# Altium PCB 05-7Segment(74HC595).PcbDoc
Units mm, origin at the board's own origin, x right, y up, seen from the top; angles counter-clockwise.
Board outline 40 x 40 mm, 4 copper layers (Top Layer, Internal Plane 1, Internal Plane 2, Bottom Layer), stack 0.462 mm thick; 21 components, 49 nets, 142 pads, 16 vias.
Unrouted connection lines stored in the file: 83.
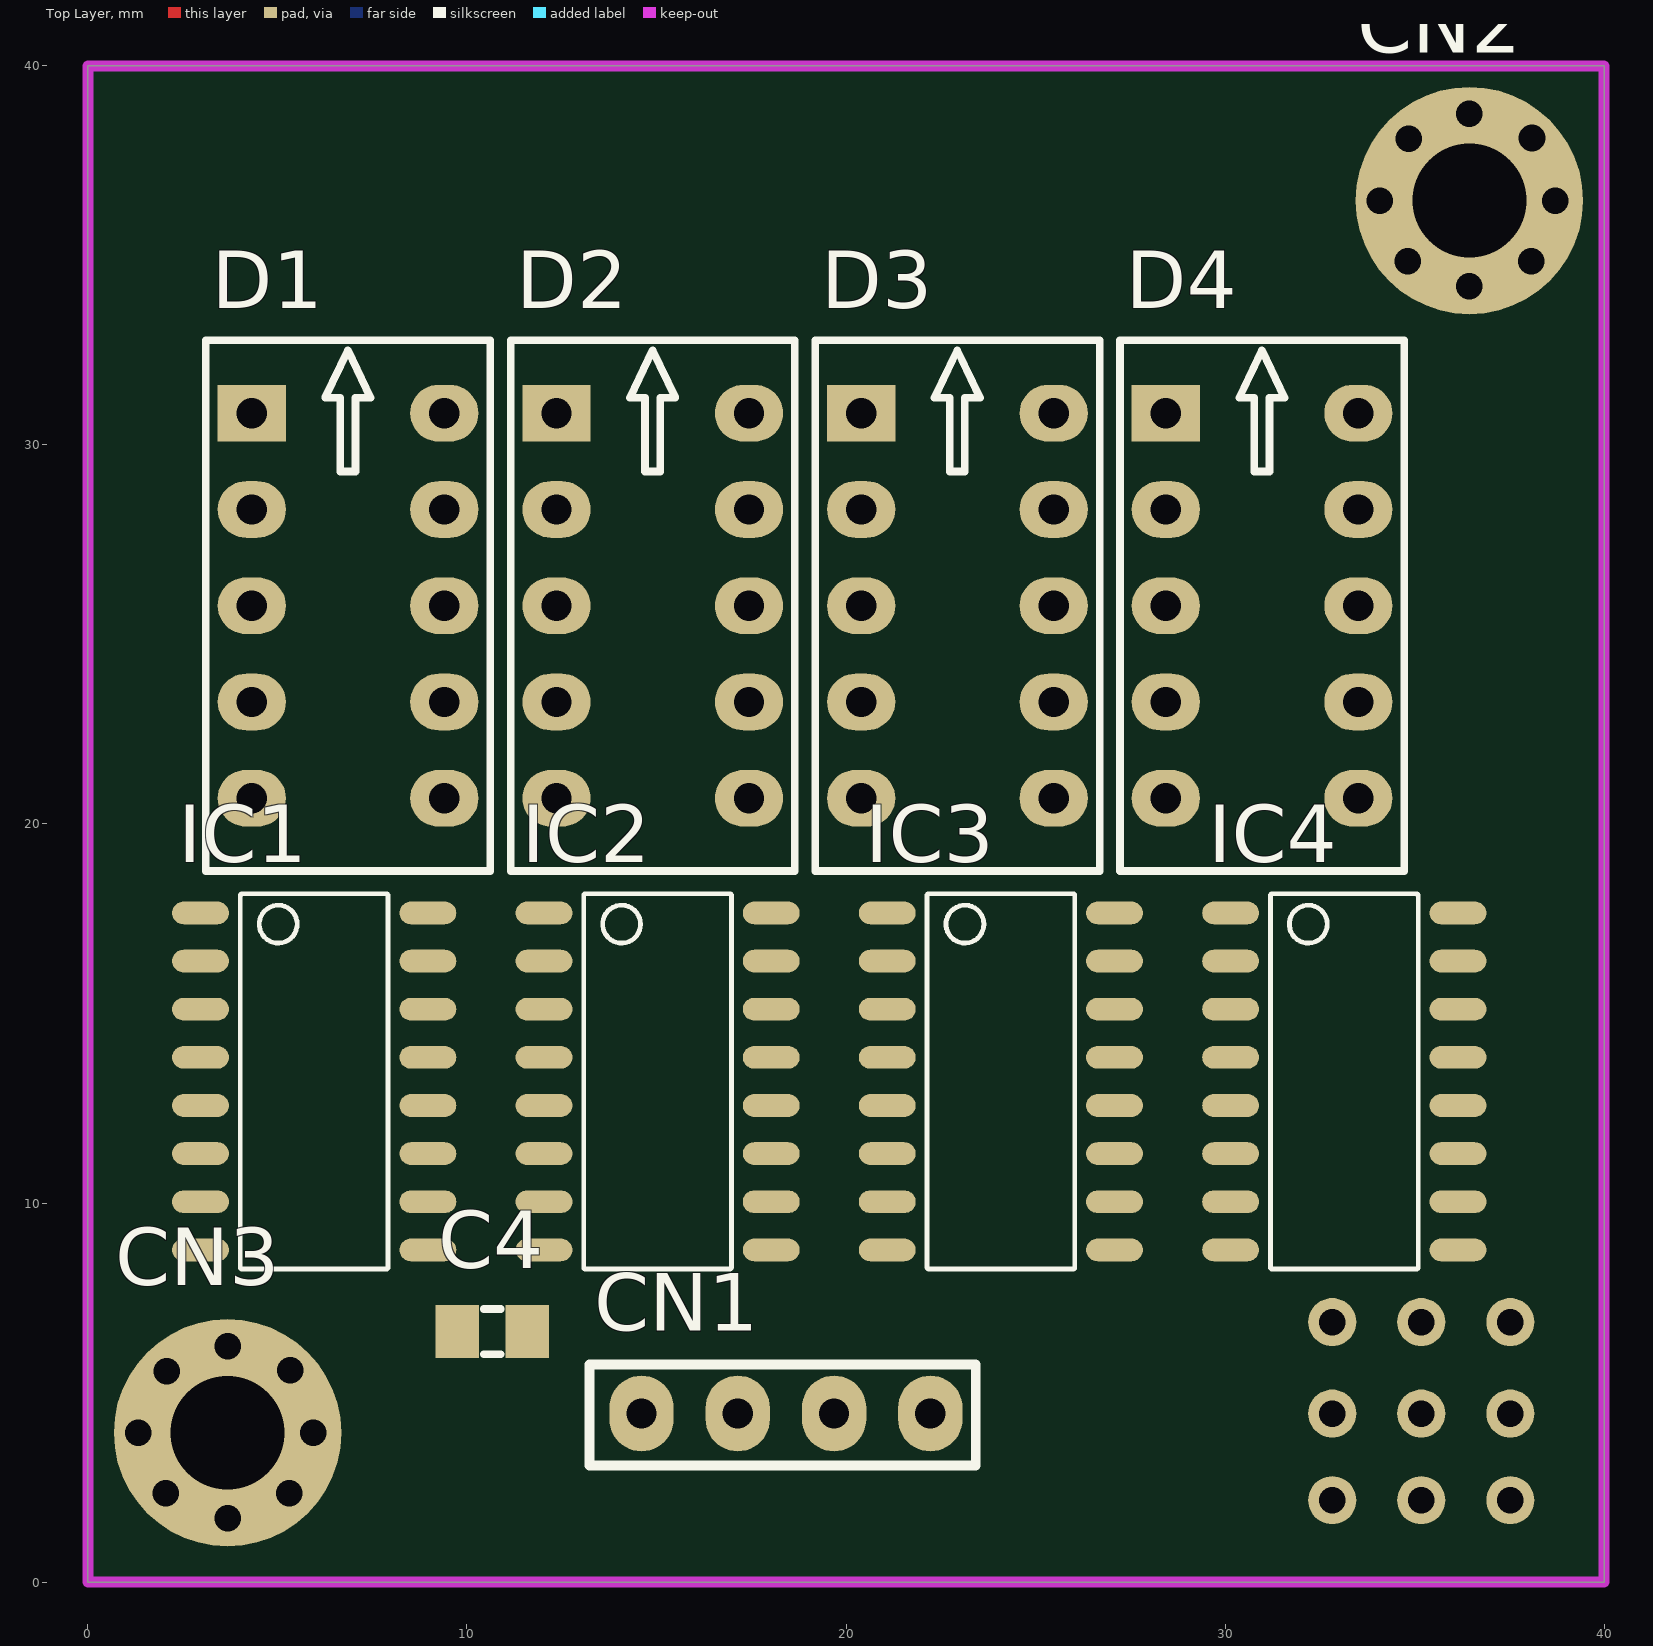
[diagram p0: Top Layer view]
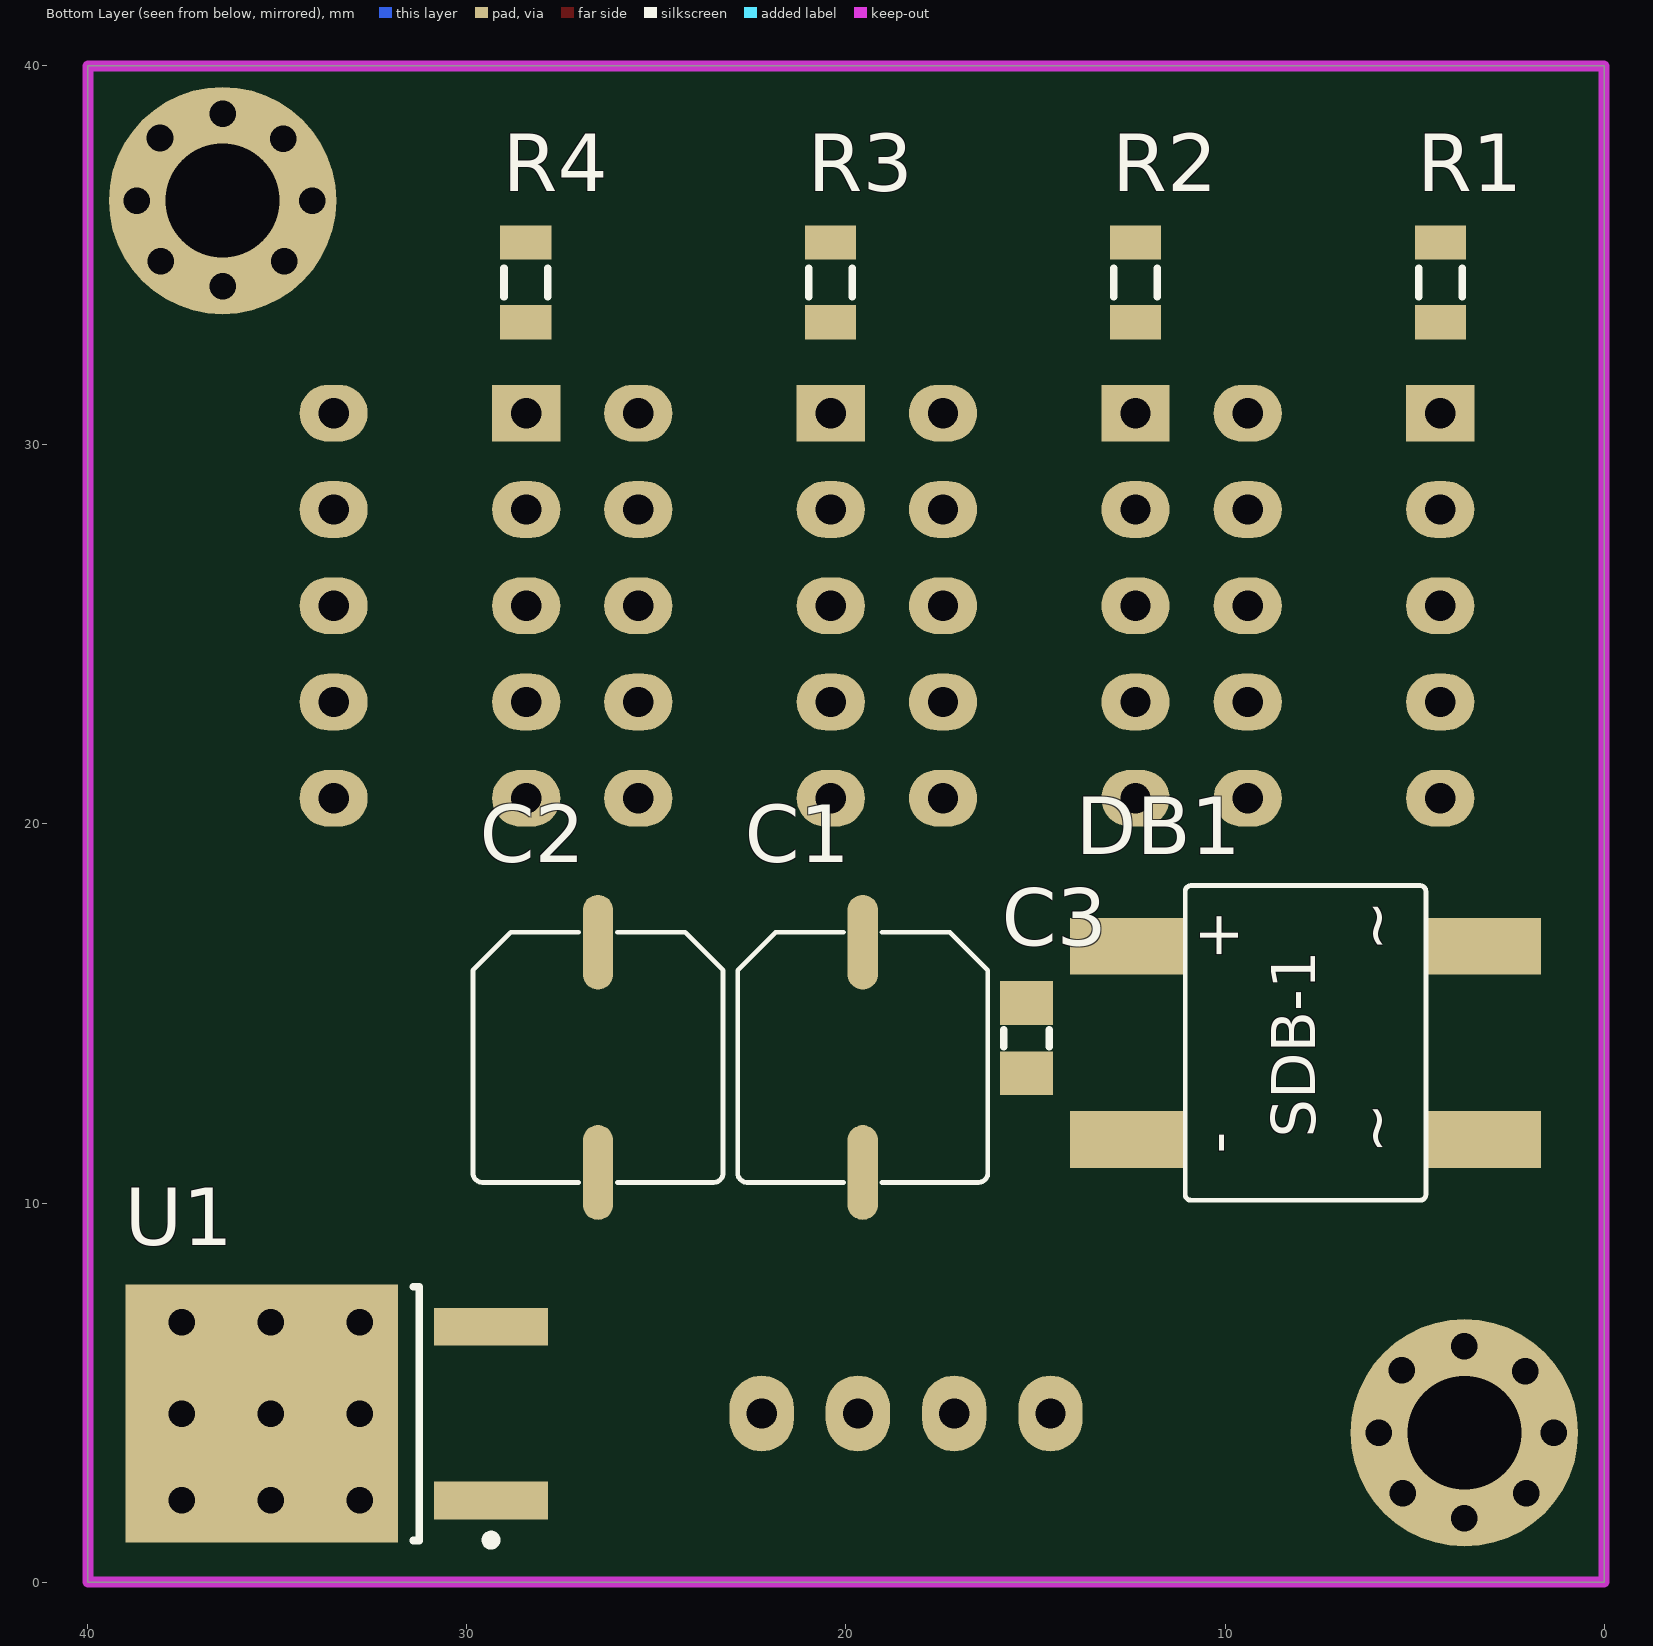
[diagram p1: Bottom Layer view, seen from below]
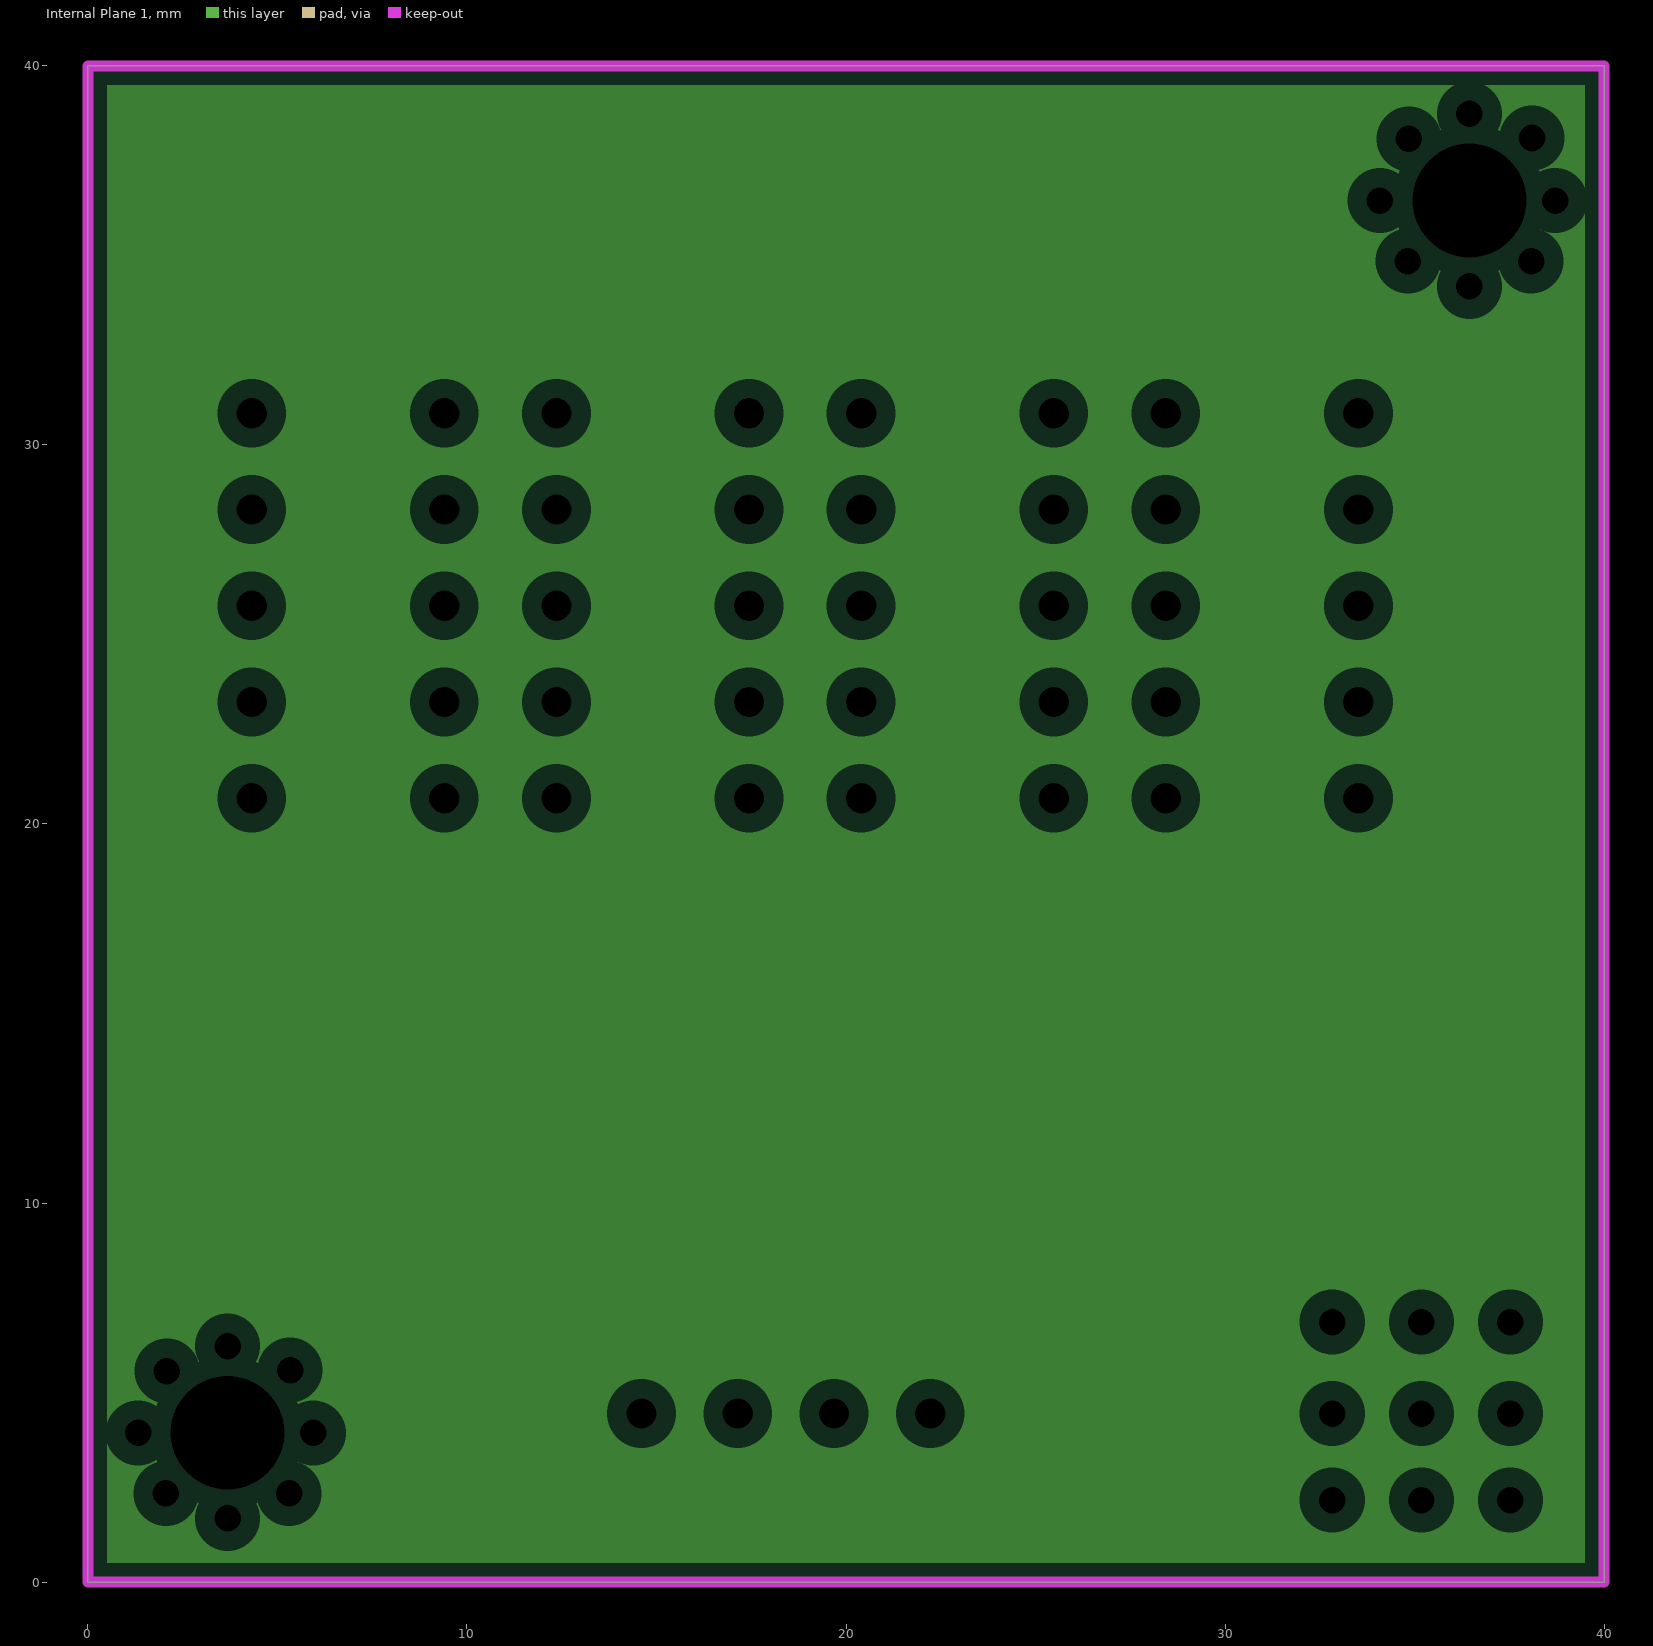
[diagram p2: Internal Plane 1, clearances drawn from the general rule]
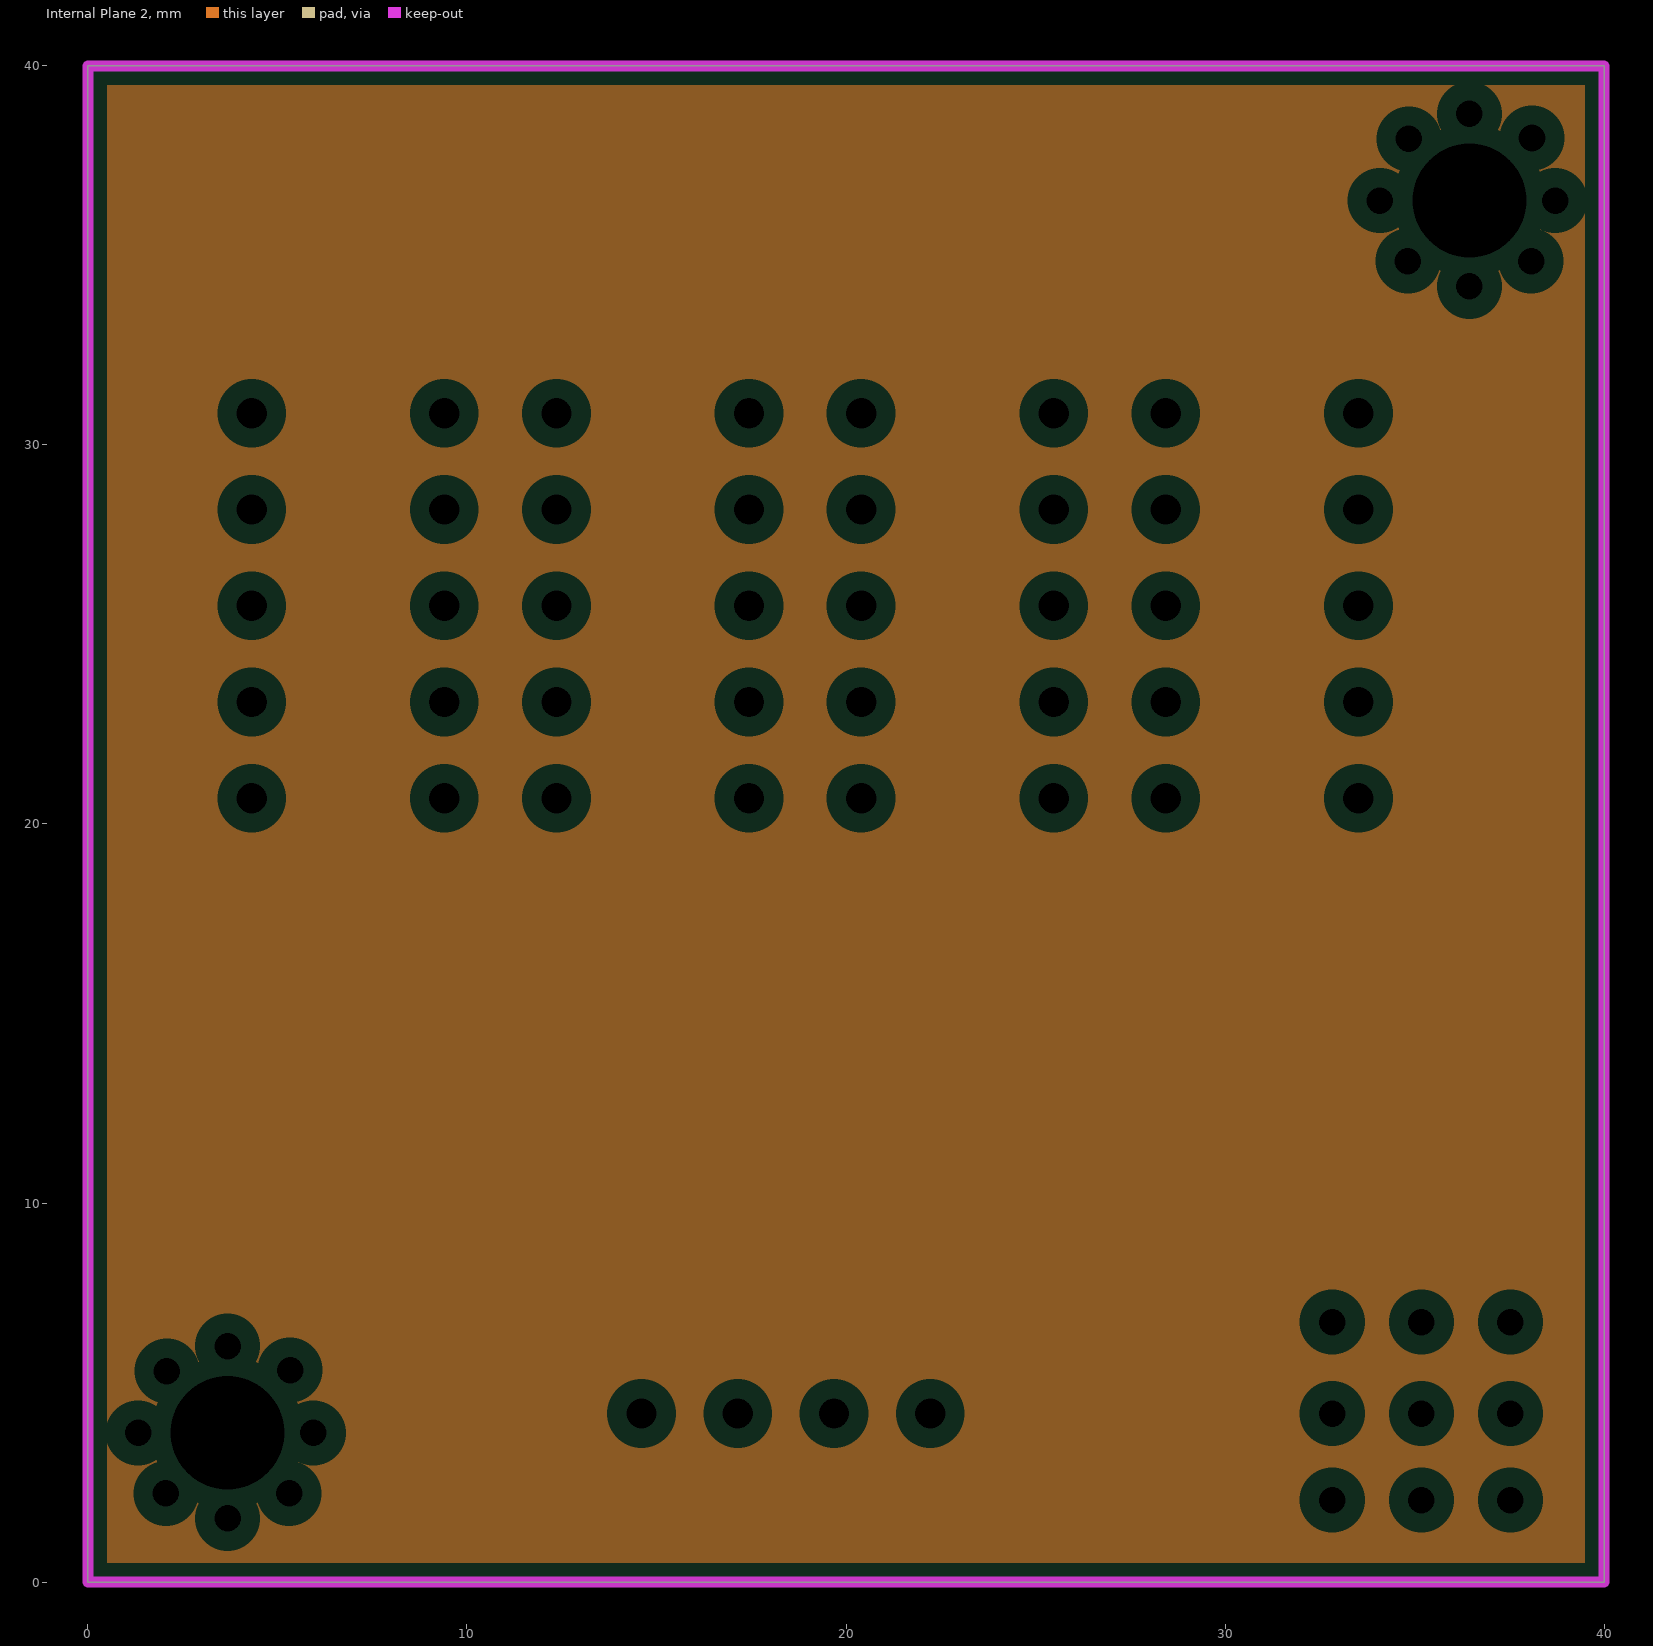
[diagram p3: Internal Plane 2, clearances drawn from the general rule]

## Layer stack, top to bottom
Top Solder: solder mask 0.0102, Solder Resist, Dk 3.5
Top Layer: signal copper 0.0356
Internal Plane 1: plane copper 0.0356
Internal Plane 2: plane copper 0.0356
Dielectric 1: dielectric 0.32, FR-4, Dk 4.8
Bottom Layer: signal copper 0.0356
Bottom Solder: solder mask 0.0102, Solder Resist, Dk 3.5

## Board outline
0,0 0,40 40,40 40,0

## Design rules (kind name [scope] priority, off if disabled: settings)
Clearance [All] p1: gap=0.18
PlaneClearance [All] p1: clearance=0.508
PlaneConnect [All] p1: planeconnectstyle=Relief reliefexpansion=0.508 reliefentries=4 reliefconductorwidth=0.254 reliefairgap=0.254
PolygonConnect [All] p1: connectstyle=Relief reliefconductorwidth=0.254 reliefentries=4 polygonreliefangle="90 Angle" airgapwidth=0.254
RoutingVias [All] p1: holewidth=0.7 width=1 viastyle="Through Hole" minholewidth=0.7 minwidth=1 maxholewidth=0.7 maxwidth=1
SolderMaskExpansion [All] p1: expansion=0.102
Width [All] p1: maxlimit=0.2 minlimit=0.2 preferedwidth=0.2
28 further rules are at their usual default settings.

## Components (designator, comment, footprint, x,y, rotation, side; value= is the part's Value field where it differs from the comment)
C1 "470uF" C-ALU-D6.5 19.558,13.843 r180 bottom
C2 "470uF" C-ALU-D6.5 26.543,13.843 r180 bottom
C3 "104" C-0805 15.24,14.351 r90 bottom
C4 "104" C-0805 10.668,6.604 r180 top
CN1 "JP4" JP4 22.225,4.445 r180 top
CN2 "VIN1" M3 36.449,36.449 r0 top
CN3 "VIN2" M3 3.683,3.937 r0 top
D1 "7SEG 0.36" LED7-0.36inch 6.858,25.751 r0 top
D2 "7SEG 0.36" LED7-0.36inch 14.897,25.751 r0 top
D3 "7SEG 0.36" LED7-0.36inch 22.936,25.751 r0 top
D4 "7SEG 0.36" LED7-0.36inch 30.975,25.751 r0 top
DB1 "Diode Brideg" D-DB-1A-SMD 7.874,14.224 r90 bottom
IC1 "74HC595" SOIC-16 5.969,13.208 r270 top
IC2 "74HC595" SOIC-16 15.028,13.208 r270 top
IC3 "74HC595" SOIC-16 24.088,13.208 r270 top
IC4 "74HC595" SOIC-16 33.147,13.208 r270 top
R1 "220R" R-0805 4.318,34.29 r90 bottom
R2 "220R" R-0805 12.361,34.29 r90 bottom
R3 "220R" R-0805 20.405,34.29 r90 bottom
R4 "220R" R-0805 28.448,34.29 r90 bottom
U1 "ASM1117" TO-252 33.465,4.445 r0 bottom

## Footprints (in the part's own frame and the unit in brackets; to place one, negate y for a bottom-side part, rotate by r counter-clockwise, add the part's x,y. Pads: shape width x height; smd on the part's side, far side on the other; paste and mask are expansions set on the pad)
C-0805 [mm] "Chip Capacitor, 2-Leads, Body 2.0x1.3mm, IPC Medium Density"
  rect 1.15x1.4 smd: 1(-0.925,0) 2(0.925,0)
  silkscreen extent -0.22,-0.6 0.23,0.6, body extent -1,-0.63 1,0.62, height 0.5
C-ALU-D6.5 [mm] "6.3x5.4mm"
  oval 0.8x2.5 smd: 1(0,3.038) 2(0,-3.038)
  silkscreen extent -3.3,-3.3 3.3,3.3, body extent -3.3,-3.8 3.3,3.8, height 6.25
D-DB-1A-SMD [mm] "DB106S"
  rect 1.5x3 smd: 1(-2.55,-4.713) 2(2.55,-4.713) 3(2.55,4.713) 4(-2.55,4.713)
  silkscreen extent -4.15,-3.18 4.15,3.18, body extent -4.15,-4.95 4.15,4.95, height 3.35
JP4 [mm]
  oval 1.7x2 hole 0.8: 1(0,0) 2(2.54,0) 3(5.08,0) 4(7.62,0)
  silkscreen extent -1.19,-1.3 8.99,1.37, body extent -1.27,-1.24 8.89,1.3, height 6.03
LED7-0.36inch [mm] "X=7.5 Y=14"
  rect 1.8x1.5 hole 0.8: 1(-2.536,5.088)
  oval 1.8x1.5 hole 0.8: 2(-2.536,2.548) 3(-2.536,0.008) 4(-2.536,-2.532) 5(-2.536,-5.072) 6(2.544,-5.072) 7(2.544,-2.532) 8(2.544,0.008) 9(2.544,2.548) 10(2.544,5.088)
  silkscreen extent -3.75,-6.99 3.75,7.01, body extent -3.75,-7 3.75,7, height 7.5
M3 [mm]
  round 6 hole 3: 1(0,0)
R-0805 [mm] "Chip Resistor, 2-Leads, Body 2.0x1.3mm, IPC Medium Density"
  rect 0.9x1.35 smd: 1(-1.05,0) 2(1.05,0)
  silkscreen extent -0.38,-0.58 0.38,0.58, body extent -1,-0.62 1,0.62, height 0.5
SOIC-16 [mm]
  oval 0.6x1.5 smd: 1(-4.445,-2.999) 2(-3.175,-2.999) 3(-1.905,-2.999) 4(-0.635,-2.999) 5(0.635,-2.999) 6(1.905,-2.999) 7(3.175,-2.999) 8(4.445,-2.999) 9(4.445,2.999) 10(3.175,2.999) 11(1.905,2.999) 12(0.635,2.999) 13(-0.635,2.999) 14(-1.905,2.999) 15(-3.175,2.999) 16(-4.445,2.999)
  silkscreen extent -4.95,-1.95 4.95,1.95, body extent -4.95,-3 4.95,3, height 1.3
TO-252 [mm] "AMS1117"
  rect 3x1 smd: 1(-4.1,2.29) 3(-4.1,-2.29)
  round 1.27 hole 0.7: 2(-0.635,2.286) 2(-0.635,-2.413) 2(-0.635,0) 2(1.714,-2.413) 2(1.714,0) 2(1.714,2.286) 2(4.064,0) 2(4.064,2.286) 2(4.064,-2.413)
  rect 7.2x6.8 smd: 2(1.95,0)
  silkscreen extent -4.22,-3.35 -2.05,3.46, body extent -4.55,-3.38 5.35,3.37, height 2.39

## Part data
C1 C2: library part CP1, "Cap P  0,1uF < 22uF , 16 - 50V"
C3 C4: library part CN
CN2 CN3: library part COCDONGM3
D1 D2 D3 D4: library part 7SEG0.36S
DB1: library part DB, "Convert AC to DC voltage, 4 pin"
IC1 IC2 IC3 IC4: library part 74595, "8 Bit Serial input - Parallel Output"
R1 R2 R3 R4: library part R, "Resistor 1/4W"

## Via types
v1: diameter 1, hole 0.7, Top Layer to Bottom Layer, 16 vias

## Nets (pads, with @x,y where several pads share a name; then routed paths per layer and width w, separated by ;. In a path a pad name is that pad's centre, name@x,y a point inside that pad or via, vN(x,y) a via of type N, cw(c..) or ccw(c..) an arc to the next point about the centre after c; other vN are vias at no path point)
+5V: C2.1 C4.2 IC1.10 IC1.16 IC2.10 IC2.16 IC3.10 IC3.16 IC4.10 IC4.16 R1.2 R2.2 R3.2 R4.2 U1.2
+12V: C1.1 C3.2 DB1.3 U1.3
DS1: IC1.9 IC2.14
DS2: IC2.9 IC3.14
DS3: IC3.9 IC4.14
GND: C1.2 C2.2 C3.1 C4.1 CN1.1 DB1.4 IC1.8 IC1.13 IC2.8 IC2.13 IC3.8 IC3.13 IC4.8 IC4.13 U1.1
LAT: IC2.12 IC3.12 IC4.12
NetCN2_1: CN2.1 DB1.2
  other v1: 36.449,34.188 34.823,34.849 38.075,34.849 34.087,36.449 38.71,36.449 34.849,38.075 38.1,38.1 36.449,38.735
NetCN3_1: CN3.1 DB1.1
  other v1: 3.683,1.676 2.057,2.337 5.309,2.337 1.321,3.937 5.944,3.937 2.083,5.563 5.334,5.588 3.683,6.223
NetD1_1: D1.1 D1.6 R1.1
NetD1_2: D1.2 IC1.5
NetD1_3: D1.3 IC1.6
NetD1_4: D1.4 IC1.4
NetD1_5: D1.5 IC1.3
NetD1_7: D1.7 IC1.7
NetD1_8: D1.8 IC1.2
NetD1_9: D1.9 IC1.1
NetD1_10: D1.10 IC1.15
NetD2_1: D2.1 D2.6 R2.1
NetD2_2: D2.2 IC2.5
NetD2_3: D2.3 IC2.6
NetD2_4: D2.4 IC2.4
NetD2_5: D2.5 IC2.3
NetD2_7: D2.7 IC2.7
NetD2_8: D2.8 IC2.2
NetD2_9: D2.9 IC2.1
NetD2_10: D2.10 IC2.15
NetD3_1: D3.1 D3.6 R3.1
NetD3_2: D3.2 IC3.5
NetD3_3: D3.3 IC3.6
NetD3_4: D3.4 IC3.4
NetD3_5: D3.5 IC3.3
NetD3_7: D3.7 IC3.7
NetD3_8: D3.8 IC3.2
NetD3_9: D3.9 IC3.1
NetD3_10: D3.10 IC3.15
NetD4_1: D4.1 D4.6 R4.1
NetD4_2: D4.2 IC4.5
NetD4_3: D4.3 IC4.6
NetD4_4: D4.4 IC4.4
NetD4_5: D4.5 IC4.3
NetD4_7: D4.7 IC4.7
NetD4_8: D4.8 IC4.2
NetD4_9: D4.9 IC4.1
NetD4_10: D4.10 IC4.15
SCK: IC2.11 IC3.11 IC4.11
SCLK: CN1.3 IC1.11
SDATA: CN1.4 IC1.14
SLCH: CN1.2 IC1.12
pads on no net: IC4.9

## Keep-outs
Keep-Out Layer:
  the board outline again, w0.3

## Text inside footprints (layer, text, board x,y; h text height)
DB1: Bottom Overlay "SDB-1" at 7.234,11.716 h2 r270; Bottom Overlay "-         +" at 9.271,11.303 h2 r270; Bottom Overlay "~        ~" at 5.08,11.303 h2 r270